# Altium PCB LED_Chaser.PcbDoc
Units mm, origin at the board's own origin, x right, y up, seen from the top; angles counter-clockwise.
Board outline 55 x 50 mm, 2 copper layers (Top Layer, Bottom Layer); 17 components, 16 nets, 55 pads, 27 vias.
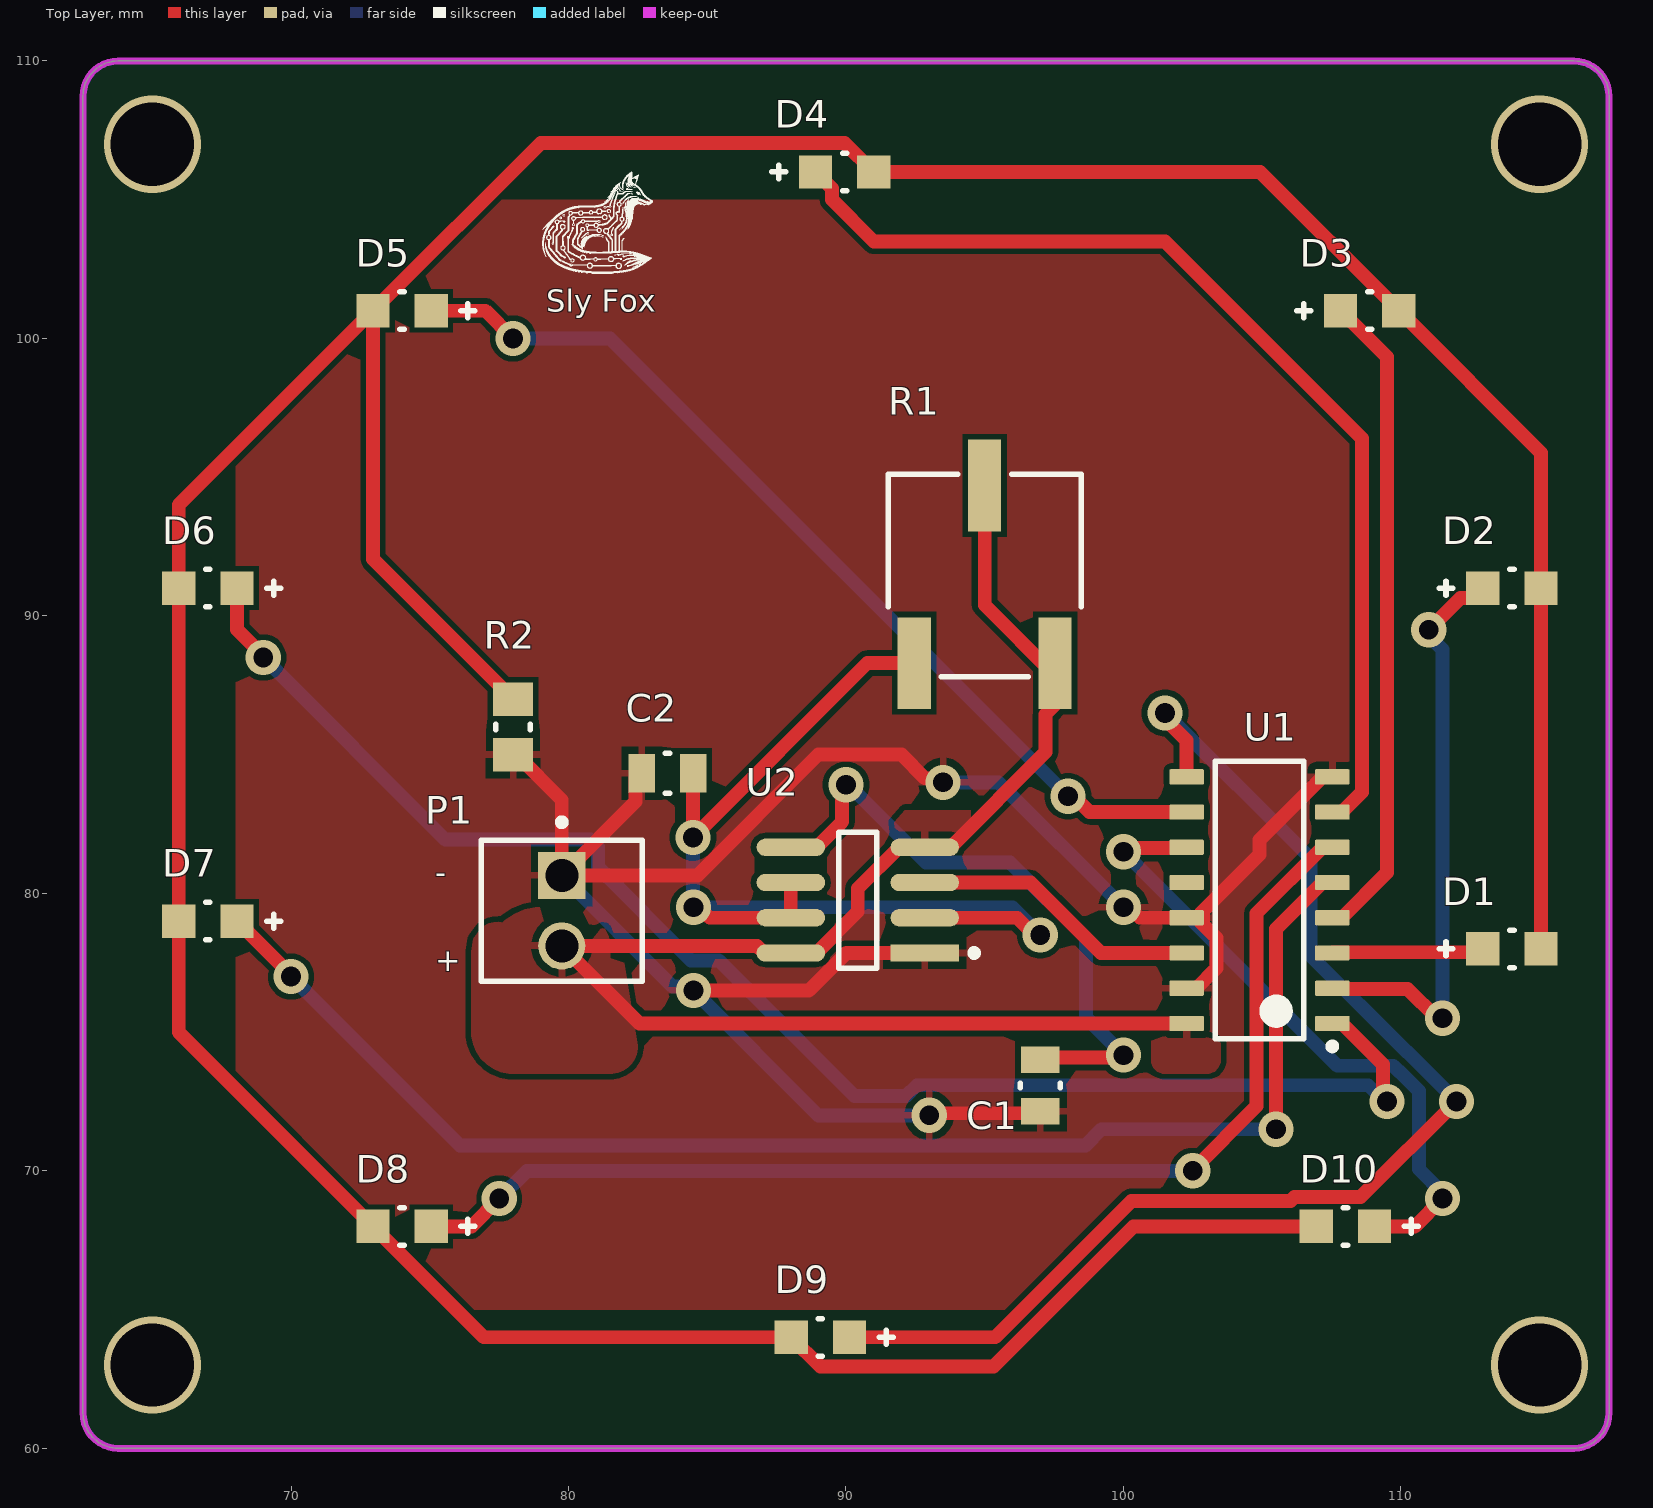
[diagram p0: Top Layer view]
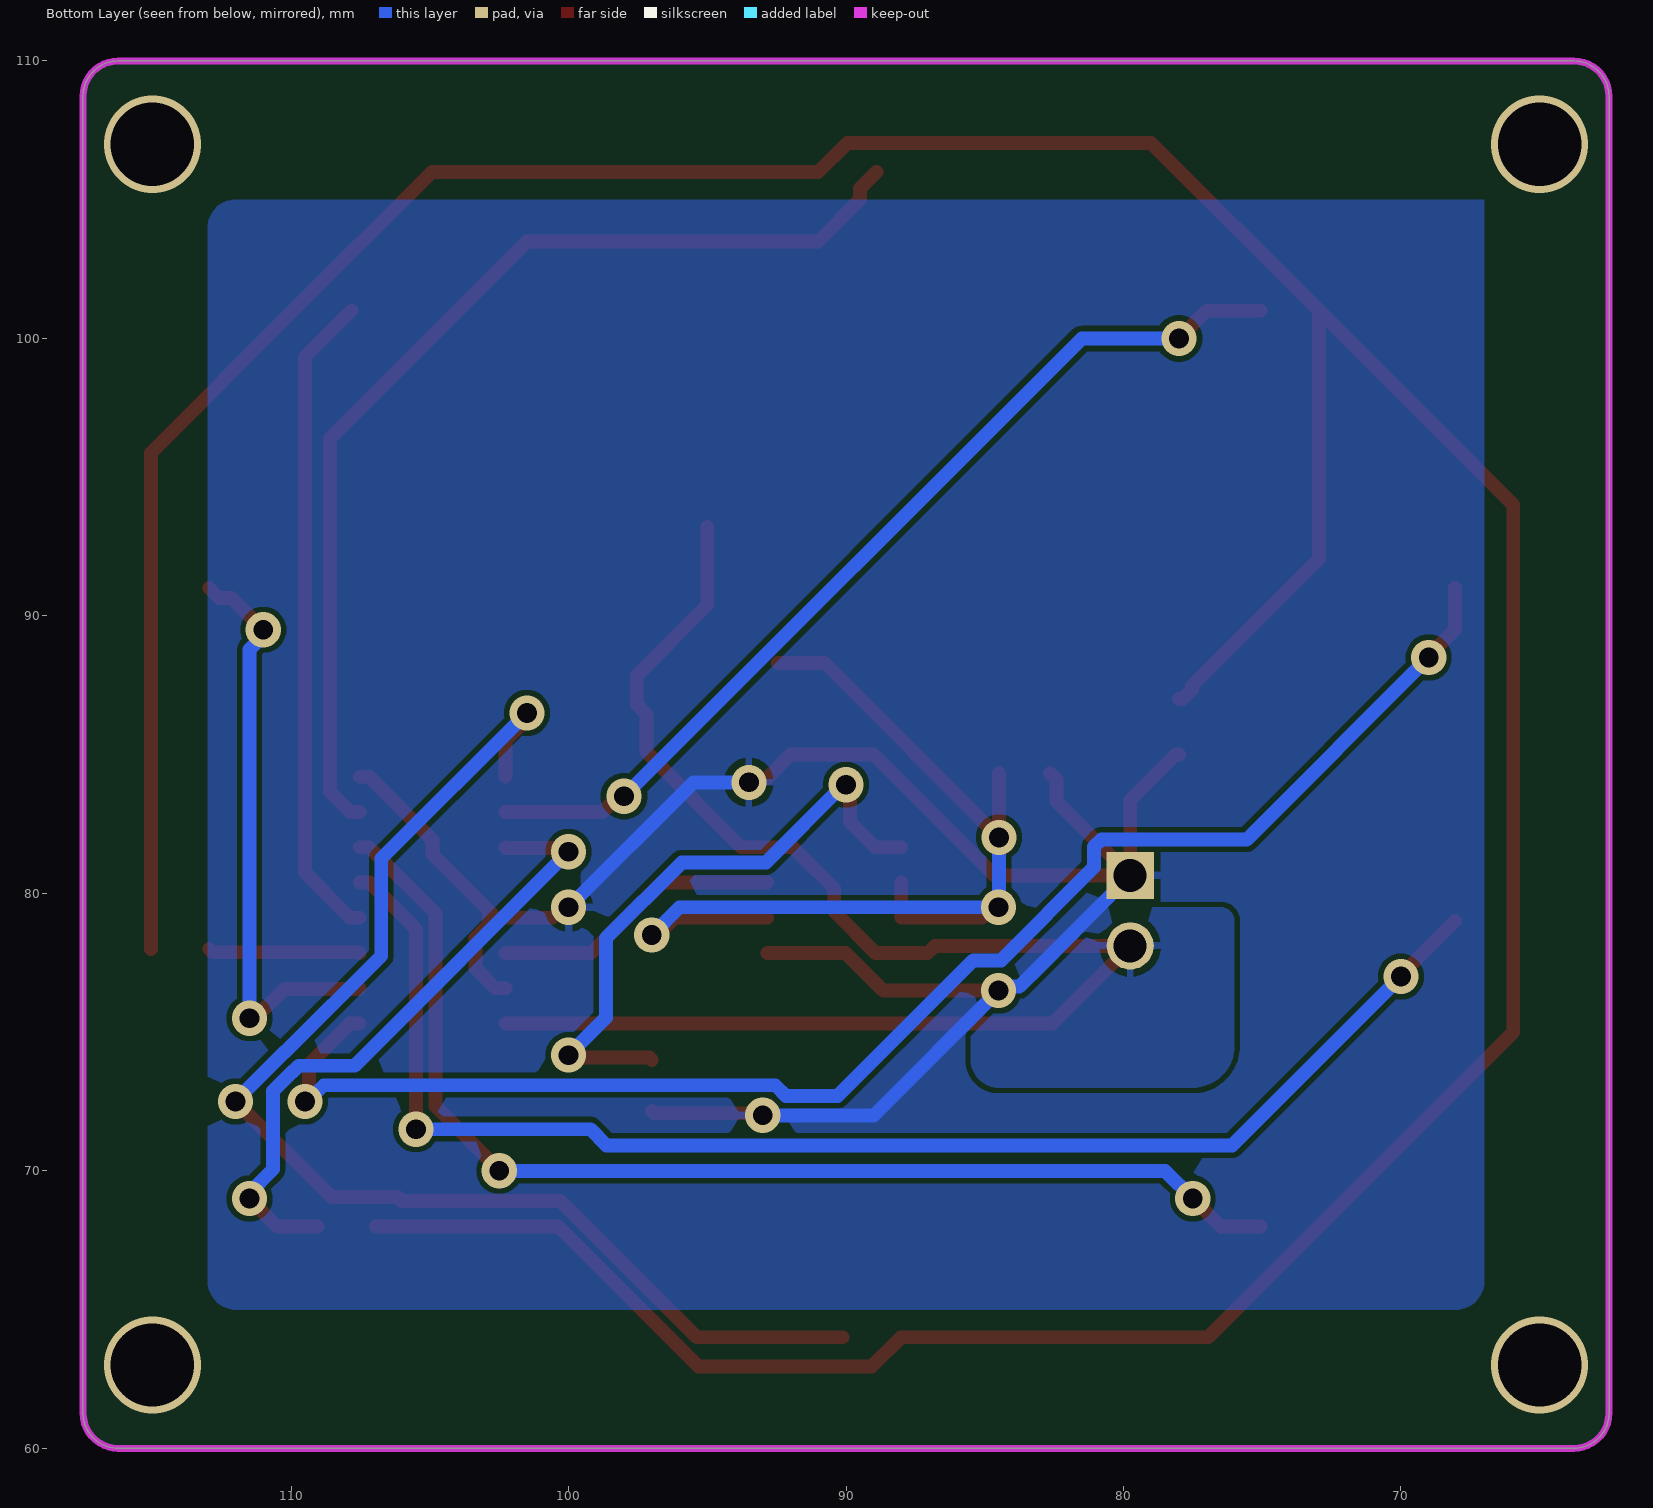
[diagram p1: Bottom Layer view, seen from below]
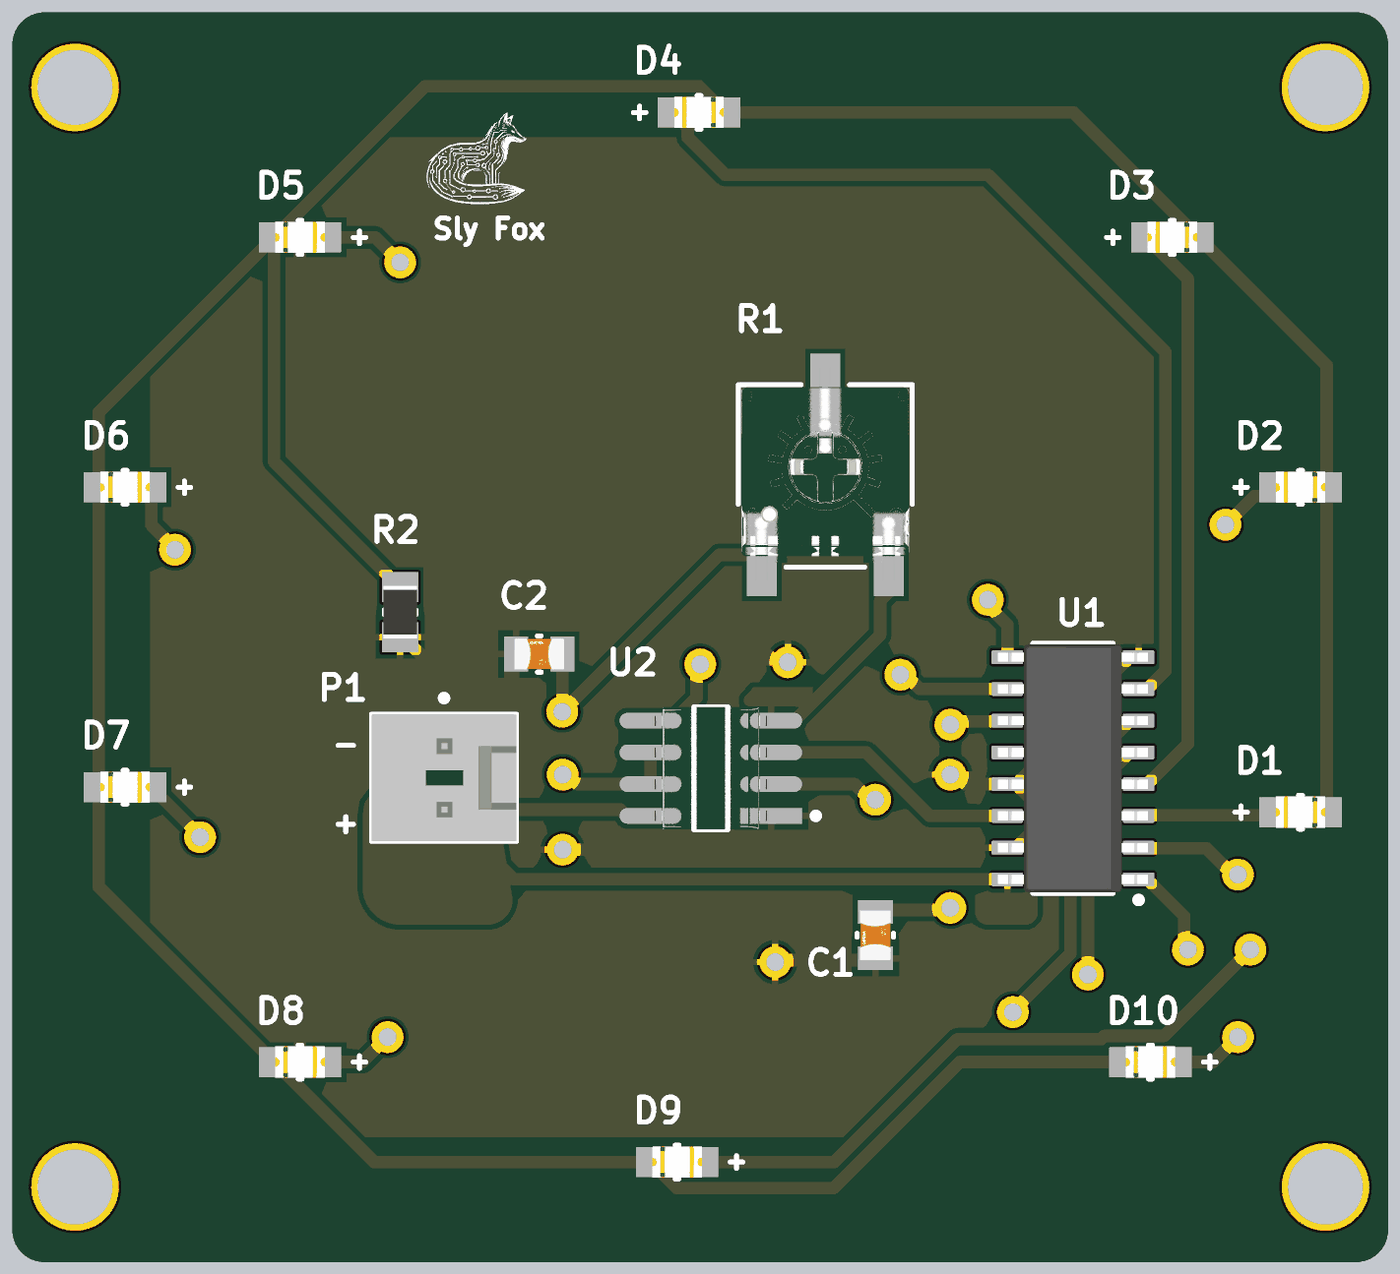
[diagram p2: 3D render of the assembled board from above, using the file's embedded part models]

## Layer stack, top to bottom
Top Solder: solder mask 0.0102, Solder Resist, Dk 3.5
Top Layer: signal copper 0.0356
Dielectric 1: dielectric 0.32, FR-4, Dk 4.8
Bottom Layer: signal copper 0.0356
Bottom Solder: solder mask 0.0102, Solder Resist, Dk 3.5

## Board outline
62.5,61.27 ccw(c63.77,61.27) 63.77,60 116.23,60 ccw(c116.23,61.27) 117.5,61.27 117.5,108.73 ccw(c116.23,108.73) 116.23,110 63.77,110 ccw(c63.77,108.73) 62.5,108.73

## Design rules (kind name [scope] priority, off if disabled: settings)
Clearance [All] p1: gap=0.2 ignorepadtopadclearanceinfootprint=TRUE
PolygonConnect [All] p1: connectstyle=Relief reliefconductorwidth=0.254 reliefentries=4 polygonreliefangle="90 Angle" airgapwidth=0.254
RoutingVias [All] p1: holewidth=0.711 width=1.27 viastyle="Through Hole" minholewidth=0.711 minwidth=1.27 maxholewidth=0.711 maxwidth=1.27
SilkToSolderMaskClearance [IsPad] p1: minsilkscreentomaskgap=0.2 clearancetoexposedcopper=TRUE
SolderMaskExpansion [All] p1: expansion=0.102 istentingtop=FALSE
SupplyNets "Schematic Supply Nets_1" [InNet('+9V')] p1: voltage=0.000
SupplyNets "Schematic Supply Nets" [InNet('GND')] p2: voltage=0.000
Width Width_Power [(InNet('+9V') OR InNet('GND'))] p1: maxlimit=1 minlimit=0.5 preferedwidth=0.6
Width [All] p2: maxlimit=0.5 minlimit=0.2 preferedwidth=0.3
29 further rules are at their usual default settings.

## Components (designator, comment, footprint, x,y, rotation, side; value= is the part's Value field where it differs from the comment)
C1 "10nf" FP-CC0805-0_85-MFG 97,73.075 r270 top value="10 nF"
C2 "10uf" FP-CC0805-0_85-MFG 83.566,84.328 r180 top value="10 uF"
D1 "LTST-C170CKT" FP-LTST-C170CKT-MFG 114,78 r180 top
D2 "LTST-C170CKT" FP-LTST-C170CKT-MFG 114,91 r180 top
D3 "LTST-C170CKT" FP-LTST-C170CKT-MFG 108.875,101 r180 top
D4 "LTST-C170CKT" FP-LTST-C170CKT-MFG 89.95,106 r180 top
D5 "LTST-C170CKT" FP-LTST-C170CKT-MFG 74,101 r0 top
D6 "LTST-C170CKT" FP-LTST-C170CKT-MFG 67,91 r0 top
D7 "LTST-C170CKT" FP-LTST-C170CKT-MFG 67,79 r0 top
D8 "LTST-C170CKT" FP-LTST-C170CKT-MFG 74,68 r0 top
D9 "LTST-C170CKT" FP-LTST-C170CKT-MFG 89.075,64 r0 top
D10 "LTST-C170CKT" FP-LTST-C170CKT-MFG 108,68 r0 top
P1 "22-27-2021" MOLX-22-27-2021_V 79.756,79.375 r270 top
R1 "50k ohm" FP-3361P-MFG 95,91.5 r0 top
R2 "220 ohm" RESC2013X60X35ML10T20 78,86 r90 top
U1 "CD74HC4017QM96EP" D0016A_L 104.902,79.756 r180 top
U2 "NE555DR" FP-D0008A-IPC_A 90.424,79.756 r180 top

## Footprints (in the part's own frame and the unit in brackets; to place one, negate y for a bottom-side part, rotate by r counter-clockwise, add the part's x,y. Pads: shape width x height; smd on the part's side, far side on the other; paste and mask are expansions set on the pad)
D0016A_L [mm] "SOIC, 16-Leads, Body 10x4mm, Pitch 1.27mm, IPC High Density"
  rrect18% 1.25x0.55 smd: 1(-2.625,4.445) 2(-2.625,3.175) 3(-2.625,1.905) 4(-2.625,0.635) 5(-2.625,-0.635) 6(-2.625,-1.905) 7(-2.625,-3.175) 8(-2.625,-4.445) 9(2.625,-4.445) 10(2.625,-3.175) 11(2.625,-1.905) 12(2.625,-0.635) 13(2.625,0.635) 14(2.625,1.905) 15(2.625,3.175) 16(2.625,4.445)
  silkscreen extent -2.75,-5 1.6,5.39, body extent -3,-4.95 3,4.95, height 1.59
FP-3361P-MFG [mm]
  rect 1.19x3.3 smd paste+0 mask+0: 1(-2.54,-3.2) 2(0,3.2) 3(2.54,-3.2)
  silkscreen extent -3.48,-3.69 3.48,3.6, body extent -3.58,-4.95 3.58,4.95, height 0.25
FP-CC0805-0_85-MFG [mm]
  rect 0.95x1.4 smd paste+0 mask+0: 1(-0.925,0) 2(0.925,0)
  silkscreen extent -0.08,-0.72 0.08,0.72, body extent -1.6,-1.05 1.6,1.05, height 0.25
FP-D0008A-IPC_A [mm]
  rect 2.469x0.622 smd paste+0 mask+0: 1(-2.414,1.905)
  rrect100% 2.469x0.622 smd paste+0 mask+0: 2(-2.414,0.635) 3(-2.414,-0.635) 4(-2.414,-1.905) 5(2.414,-1.905) 6(2.414,-0.635) 7(2.414,0.635) 8(2.414,1.905)
  silkscreen extent -4.32,-2.45 0.68,2.45, body extent -4.15,-2.95 4.15,2.95, height 0.25
FP-LTST-C170CKT-MFG [mm]
  rect 1.2x1.2 smd paste+0 mask+0: 1(-1.05,0) 2(1.05,0)
  silkscreen extent -0.08,-0.67 2.63,0.67, body extent -1.75,-0.77 1.75,0.77, height 0.25
MOLX-22-27-2021_V [mm] "Header, 2-Leads, Body 5.8x5.08mm"
  rect 1.7x1.7 hole 1.19: 1(-1.27,0)
  round 1.7 hole 1.19: 2(1.27,0)
  silkscreen extent -3.31,-2.9 2.54,2.9, body extent -2.54,-2.9 2.54,2.9, height 11.72
RESC2013X60X35ML10T20 [mm] "Chip Resistor, 2-Leads, Body 2.1x1.35mm, IPC Low Density"
  rect 1.2x1.45 smd: 1(-1,0) 2(1,0)
  silkscreen extent -0.1,-0.63 0.1,0.63, body extent -1.05,-0.68 1.05,0.67, height 0.6

## Part data
C1: library part CMP-2100-03606-3, "CAP CER 0.1UF 50V X7R 0805", Capacitance="10 nF", Manufacturer=Yageo, Manufacturer Part Number=CC0805KRX7R9BB104, Package=CC0805-0.85, Temperature="-30°C to +85°C", Temperature Characteristic=X7R, Temperature Range High=+85°C, Temperature Range Low=-30°C, Tolerance=0.1, Voltage Rating="50 V", Automotive=No, Category=Cap, ComponentLink2Description=Datasheet, ComponentLink2URL=http://www.yageo.com/documents/recent/UPY-GPHC_Y5V_6.3V-to-50V_8.pdf, Device Class L1="Passive Components", Device Class L2=Capacitors, Device Class L3="Ceramic Capacitors", Digikey Description="CAP CER 0.1UF 50V X7R 0805", Footprint Url=http://www.yageo.com/exep/pages/download/literatures/UPY-C_GEN_24.pdf, Height=0.95mm, Ipc Land Pattern Name=CAPC200125X85, Lead Free=Yes, Material=Ceramic, Mouser Description="Multilayer Ceramic Capacitors MLCC - SMD/SMT 100nF 50V X7R 10%", Octopart=https://octopart.com/cc0805krx7r9bb104-yageo-192993, RoHS=TRUE
C2: library part CMP-2100-03606-3, "CAP CER 0.1UF 50V X7R 0805", Capacitance="10 uF", Manufacturer=Yageo, Manufacturer Part Number=CC0805KRX7R9BB104, Package=CC0805-0.85, Temperature="-30°C to +85°C", Temperature Characteristic=X7R, Temperature Range High=+85°C, Temperature Range Low=-30°C, Tolerance=0.1, Voltage Rating="50 V", Automotive=No, Category=Cap, ComponentLink2Description=Datasheet, ComponentLink2URL=http://www.yageo.com/documents/recent/UPY-GPHC_Y5V_6.3V-to-50V_8.pdf, Device Class L1="Passive Components", Device Class L2=Capacitors, Device Class L3="Ceramic Capacitors", Digikey Description="CAP CER 0.1UF 50V X7R 0805", Footprint Url=http://www.yageo.com/exep/pages/download/literatures/UPY-C_GEN_24.pdf, Height=0.95mm, Ipc Land Pattern Name=CAPC200125X85, Lead Free=Yes, Material=Ceramic, Mouser Description="Multilayer Ceramic Capacitors MLCC - SMD/SMT 100nF 50V X7R 10%", Octopart=https://octopart.com/cc0805krx7r9bb104-yageo-192993, RoHS=TRUE
D1 D2 D3 D4 D5 D6 D7 D8 D9 D10: library part CMP-1674-00001-6, "LED RED CLEAR SMD", Case Code (Imperial)=0805, Case Code (Metric)=2012, Color=Red, Forward Current=40mA, Forward Voltage=1.8V, Lens Color=Colorless, Max Operating Temperature=85°C, Max Power Dissipation=100mW, Min Operating Temperature=-55°C, Package Quantity=1, Reverse Voltage=5V, Test Current=10mA, Case/Package=0805, Depth=1.25mm, Dominant Wavelength=638nm, Height=1.1mm, Illumination Color=Red, Lead Free="Lead Free", Length=2mm, Lens Style=Diffused, Lens Transparency=Clear, Luminous Intensity=10mcd, Mount="Surface Mount", Number of Elements=1, Number of LEDs=1, Number of Pins=2, Packaging="Tape and Reel", Power Dissipation=100mW, Power Rating=100mW, Radiation Hardening=No, Viewing Angle=130°, Voltage=5V, Wavelength=660nm, Width=1.25mm
P1: library part CMP-2000-05537-1, "Male Header, Pitch 2.54 mm, 1 x 2 Position, Height 11.7 mm, Tail Length 3.56 mm, 0 to 75 degC, RoHS, Bulk", Current - Max=4A, Manufacturer=Molex, Operating temperature=0°Cto+75°C, Package Description="2-Leads Header, Body 5.08 x 5.8 mm, Pitch 2.54 mm", Package Version="Rev. BC, 02/2012", PartNumber=0022272021, Voltage - Max=250V, Contact material=Tinplatedbrass, Current rating=4A, Datasheet URL=http://www.molex.com/pdm_docs/sd/022272021_sd.pdf, Datasheet Version="Rev. F, 06/2009", Housing material=Nylon(UL94V-0), Manufacturer URL=http://www.molex.com/, Mounting Technology=ThroughHole, No. of Positions=2, No. of Rows=1, Orientation=Vertical, Package Reference=22-27-2021, Pitch=2.54mm, Voltage Rating=250V
R1: library part CMP-07234-000057-1, "TRIMMER 50K OHM 0.5W GW TOP ADJ", Color=Natural, Max Operating Temperature=125°C, Max Power Dissipation=500mW, Min Operating Temperature=-55°C, Package Quantity=1, Resistance=50kR, Resistance Tolerance=10%, Resistor Type=Cermet, Temperature Coefficient=100ppm/°C, Voltage Rating=300V, Contact Plating=Tin, Depth=8.53mm, Height=0.205inch, Lead Free="Lead Free", Length=6.71mm, Military Standard=Not, Mount="Surface Mount", Number of Turns=1, Packaging="Tape and Reel", Power Rating=500mW, Radiation Hardening=No, Reach SVHC Compliant=Yes, RoHS Compliant=Yes, Series=3361, Taper=Linear, Technology=CERMET, Termination="Gull Wing", Tolerance=10%, Voltage Rating (DC)=300V, Weight=0.567g, Width=0.264inch
R2: library part CMP-2100-03671-1, "Chip Resistor, 1 KOhm, +/- 1%, 125 mW, -55 to 155 degC, 0805 (2012 Metric), RoHS, Tape and Reel", Case Code (Imperial)=0805, Case Code (Metric)=2012, Manufacturer=Yageo, Max Operating Temperature=155degC, Max Power Dissipation=125mW, Min Operating Temperature=-55degC, Package Description="2-Pin Surface Mounted Device, Body 2 x 1.25 mm", Package Quantity=1, Resistance=220Ohm, Temperature Coefficient=100ppm/degreesC, Tolerance=1%, Voltage Rating=150V, Case/Package=0805, Composition=ThickFilm, Datasheet URL=http://www.yageo.com/NewPortal/yageodocoutput?fileName=/pdf/R-Chip/PYu-RC_Group_51_RoHS_L_5.pdf, Datasheet Version="Rev. 5, 10/2016", Depth=1.25mm, Height=0.024inch, Lead Free=LeadFree, Length=0.079inch, Manufacturer URL=http://www.yageo.com/, Military Standard=Not, Number of Pins=2, Number of Terminations=2, Package Reference=0805, Packaging=TapeandReel, Power Rating=125mW, REACH SVHC=Unknown, RoHSCompliant=true, Termination=SMD/SMT, Voltage Rating (DC)=150V, Width=0.049inch
U1: library part CMP-1623-00110-2, "Enhanced Product Decade Counter/Divider With 10 Decoded Outputs, D0016A, LARGE T&R", F @ Nom Voltage(Max)(Mhz)=28, Generic Part Number=CD74HC4017-EP, ICC @ Nom Voltage(Max)(mA)=0.08, Manufacturer="Texas Instruments", Operating Temperature Range(C)="-40 to 125", Rating="HiRel Enhanced Product", tpd @ Nom Voltage(Max)(ns)=54, Voltage(Nom)(V)=6, Bits(#)=10, Code_JEDEC="MS-012 variation AC", DatasheetVersion=SCLS550, Function=Counter, Inputs=1, Output Drive (IOL/IOH)(Max)(mA)=5.2/-5.2, PackageReference=D0016A, Technology Family=HC, Type=Decade, VCC(Max)(V)=6, VCC(Min)(V)=2
U2: library part CMP-1685-00007-2, "IC OSC SGL TIMER 100KHZ 8-SOIC", Case/Package=SOIC, Frequency=100kHz, High Level Output Current=-200mA, Low Level Output Current=200mA, Max Operating Temperature=70°C, Max Supply Voltage=16V, Min Operating Temperature=0°C, Min Supply Voltage=4.5V, Operating Supply Current=10mA, Package Quantity=2500, Quiescent Current=15mA, Contact Plating=Gold, Height=1.58mm, Lead Free="Lead Free", Length=4.9mm, Mount="Surface Mount", Number of Pins=8, Number of Timers/Counters=1, Packaging="Tape and Reel", Radiation Hardening=No, REACH SVHC="No SVHC", Weight=0.002561oz, Width=3.91mm

## Via types
v1: diameter 1.27, hole 0.711, Top Layer to Bottom Layer, 23 vias
v2: diameter 3.5, hole 3, Top Layer to Bottom Layer, 4 vias

## Nets (pads, with @x,y where several pads share a name; then routed paths per layer and width w, separated by ;. In a path a pad name is that pad's centre, name@x,y a point inside that pad or via, vN(x,y) a via of type N, cw(c..) or ccw(c..) an arc to the next point about the centre after c; other vN are vias at no path point)
+9V: P1.2 R1.2 R1.3 U1.16 U2.4 U2.8 | length 54
  Top Layer w0.5: R1.2@95,93.2 95,90.395 97.54,87.855 97.54,86.8 97.195,86.455 97.195,85.095 93.761,81.661 U2.4 91.914,81.661 90.424,80.171 90.424,79.341 88.934,77.851 U2.8 87.054,77.851 86.8,78.105 P1.2 82.55,75.311 U1.16
cathode: D1.1 D2.1 D3.1 D4.1 D5.1 D6.1 D7.1 D8.1 D9.1 D10.1 R2.2 | length 160.3
  Top Layer w0.5: R2.2 77.875,87 77.525,87.35 77.525,87.475 72.95,92.05 D5.1 ; D10.1 100.362,68 95.312,62.95 89.075,62.95 D9.1 76.95,64 D8.1 65.95,75 D7.1 D6.1 65.95,94 D5.1 ; D1.1 D2.1 115.05,95.875 D3.1 104.925,106 D4.1 89.95,107.05 79,107.05 D5.1
ContVolt: C1.1 U2.5 | length 22.4
  Top Layer w0.5: U2.5 88.934,81.661 89.853,82.58 89.853,83.768 v1(90,83.915) ; C1.1 97.085,74.085 99.915,74.085 v1(100,74.17)
  Bottom Layer w0.5: v1(90,83.915) 90.085,83.915 92.882,81.118 95.916,81.118 98.651,78.383 98.651,75.519 v1(100,74.17)
DisCharge: C2.1 R1.1 U2.2 U2.6 U2.7 | length 37.7
  Top Layer w0.5: C2.1 84.487,84.324 84.487,82.021 v1(84.483,82.017) 90.766,88.3 R1.1 ; v1(84.5,79.5) 84.708,79.5 85.087,79.121 U2.7 U2.6 ; U2.2 96.171,79.121 96.792,78.5 v1(97,78.5)
  Bottom Layer w0.5: v1(84.483,82.017) 84.491,82.009 84.491,79.509 v1(84.5,79.5) 96,79.5 v1(97,78.5)
GND: C1.2 C2.2 P1.1 R2.1 U1.8 U1.13 U1.15 U2.1 | length 77.9
  Top Layer w0.5: R2.1 78.125,85 79.756,83.369 P1.1 ; C2.2 82.416,84.103 82.416,83.305 P1.1 ; v1(84.5,76.5) 88.659,76.5 90.01,77.851 U2.1 ; v1(93,72) 93.075,72.075 96.925,72.075 C1.2 ; v1(93.5,84) 93.353,84.147 92.853,84.147 92,85 89,85 84.645,80.645 P1.1 ; v1(100,79.5) 100.208,79.5 100.587,79.121 U1.13 ; U1.15 102.627,76.581 103.352,77.306 103.352,78.396 U1.13@102.874,78.874 ; U1.8 107.177,84.201 104.902,81.926 104.902,81.396 U1.13@102.874,79.368 ; U1.13@102.874,78.874 102.627,79.121 U1.13@102.874,79.368 ; U1.13@102.874,78.874 U1.13@102.874,79.368
  Bottom Layer w0.5: P1.1 83.754,76.647 84.353,76.647 v1(84.5,76.5) 89,72 v1(93,72) ; v1(93.5,84) 95.5,84 v1(100,79.5)
NetD1_2: D1.2 U1.3 | length 5.5
  Top Layer w0.5: U1.3 107.552,77.876 112.826,77.876 D1.2
NetD2_2: D2.2 U1.2 | length 21.2
  Top Layer w0.5: U1.2 107.552,76.556 110.244,76.556 111.3,75.5 v1(111.5,75.5) ; v1(111,89.5) 112.15,90.65 112.6,90.65 D2.2
  Bottom Layer w0.5: v1(111,89.5) 111,89.292 111.5,88.792 v1(111.5,75.5)
NetD3_2: D3.2 U1.4 | length 23.6
  Top Layer w0.5: U1.4 107.877,79.121 109.5,80.744 109.5,99.325 D3.2
NetD4_2: D4.2 U1.7 | length 38
  Top Layer w0.5: D4.2 89.5,105.4 89.5,105 91,103.5 101.5,103.5 108.602,96.398 108.602,83.656 107.877,82.931 U1.7
NetD5_2: D5.2 U1.10 | length 34.7
  Top Layer w0.5: D5.2 77,101 v1(78,100) ; v1(98,83.5) 98.208,83.5 98.777,82.931 U1.10
  Bottom Layer w0.5: v1(78,100) 81.5,100 v1(98,83.5)
NetD6_2: D6.2 U1.1 | length 54.6
  Top Layer w0.5: D6.2 68.05,89.509 69,88.559 v1(69,88.5) ; U1.1 107.877,75.311 109.353,73.835 109.353,72.647 v1(109.5,72.5)
  Bottom Layer w0.5: v1(69,88.5) 75.555,81.945 80.792,81.945 81.056,81.681 81.056,80.944 84.415,77.585 85.415,77.585 90.3,72.7 92.166,72.7 92.551,73.085 108.822,73.085 109.407,72.5 v1(109.5,72.5)
NetD7_2: D7.2 U1.5 | length 51
  Top Layer w0.5: D7.2 70,77.05 v1(70,77) ; v1(105.5,71.5) 105.5,78.714 107.177,80.391 U1.5
  Bottom Layer w0.5: v1(70,77) 76.085,70.915 98.629,70.915 99.214,71.5 v1(105.5,71.5)
NetD8_2: D8.2 U1.6 | length 42.2
  Top Layer w0.5: D8.2 76.5,68 v1(77.5,69) ; v1(102.5,70) 102.5,70.034 104.8,72.334 104.8,79.284 107.177,81.661 U1.6
  Bottom Layer w0.5: v1(77.5,69) 78.5,70 v1(102.5,70)
NetD9_2: D9.2 U1.9 | length 46.4
  Top Layer w0.5: D9.2 95.373,64 100.288,68.915 106.029,68.915 106.164,69.05 108.55,69.05 v1(112,72.5) ; v1(101.5,86.5) 101.5,86.292 102.277,85.515 U1.9
  Bottom Layer w0.5: v1(101.5,86.5) 106.75,81.25 106.75,77.75 110.215,74.285 110.239,74.285 112,72.524 v1(112,72.5)
NetD10_2: D10.2 U1.11 | length 23.7
  Top Layer w0.5: v1(100,81.5) 100.136,81.636 102.252,81.636 U1.11 ; D10.2 110.5,68 v1(111.5,69)
  Bottom Layer w0.5: v1(100,81.5) 107.715,73.785 109.725,73.785 109.925,73.585 109.949,73.585 110.651,72.883 110.651,70.057 111.5,69.208 v1(111.5,69)
Q: U1.14 U2.3 | length 10.5
  Top Layer w0.5: U2.3 96.643,80.391 99.183,77.851 U1.14
pads on no net: U1.12
copper on no net:
  other v2: 65,63 115,63 65,107 115,107

## Polygon pours and split planes (outlines as drawn)
GND on Top Layer "GND_L01_P008" (solid, remove dead copper, pour order 8): 68,105 68,66 ccw(c69,66) 69,65 112,65 ccw(c112,66) 113,66 113,103 ccw(c111,103) 111,105
+9V on Top Layer "+9V_L01_P005" (solid, remove dead copper, pour order 5): 103.5,75.5 ccw(c103,75.5) 103,76 101,76 101,74 ccw(c101.5,74) 101.5,73.5 103,73.5 ccw(c103,74) 103.5,74
+9V on Top Layer "+9V_L01_P004" (solid, remove dead copper, pour order 4): 77,77.5 cw(c79,77.5) 79,79.5 80,79.5 cw(c80,78) 81.5,78 81.5,76.5 cw(c80.5,76.5) 80.5,75.5 78,75.5
+9V on Top Layer "+9V_L01_P003" (solid, remove dead copper, pour order 3): 94.5,83 92,83 ccw(c92,82.5) 91.5,82.5 91.5,81 cw(c89.5,81) 89.5,79 87.5,79 ccw(c87.5,78) 86.5,78 ccw(c87.5,78) 87.5,77 88.96,77 ccw(c88.96,79.54) 91.5,79.54 91.5,80 91.96,80 ccw(c91.96,82.54) 94.5,82.54
+9V on Top Layer "+9V_L01_P000" (solid, remove dead copper, pour order 0): 76.57,78.368 ccw(c77.5,78) 76.5,78 76.5,75 ccw(c78,75) 78,73.5 81.5,73.5 ccw(c81.5,74.5) 82.5,74.5 82,77.5 77.749,78.917 ccw(c77.449,78.02)
GND on Bottom Layer "GND_L02_P009" (solid, remove dead copper, pour order 9): 67,105 67,66 ccw(c68,66) 68,65 112,65 ccw(c112,66) 113,66 113,104 ccw(c112,104) 112,105
+9V on Bottom Layer "+9V_L02_P007" (solid, remove dead copper, pour order 7): 82,78.5 ccw(c81,78.5) 81,79.5 76.5,79.5 ccw(c76.5,79) 76,79 76,74.5 ccw(c77.5,74.5) 77.5,73 84.5,73 ccw(c84.5,74) 85.5,74 85.5,76.96 ccw(c82.96,76.96) 82.96,79.5 81.5,79.5

## Keep-outs
Keep-Out Layer:
  lines w0.254: 62.5,61.27 ccw(c63.77,61.27) 63.77,60 116.23,60 ccw(c116.23,61.27) 117.5,61.27 117.5,95 117.5,108.73 ccw(c116.23,108.73) 116.23,110 63.77,110 ccw(c63.77,108.73) 62.5,108.73 62.5,61.27

## Silkscreen, mask and mechanical layers (free items; w line width, h text height)
Top Overlay:
  drawing of 31 lines, arcs and shapes, not listed
  text "Sly Fox" at 79.2,100.967 h0.8
  text "-" at 75.2,80.357 h0.8
  text "+" at 75.2,77.2 h0.8